# Altium PCB CPU.2.PcbDoc
Units mm, origin at the board's own origin, x right, y up, seen from the top; angles counter-clockwise.
Board outline 42.5 x 22 mm, 2 copper layers (Top Layer, Bottom Layer), stack 0.904 mm thick; 38 components, 70 nets, 300 pads, 85 vias.
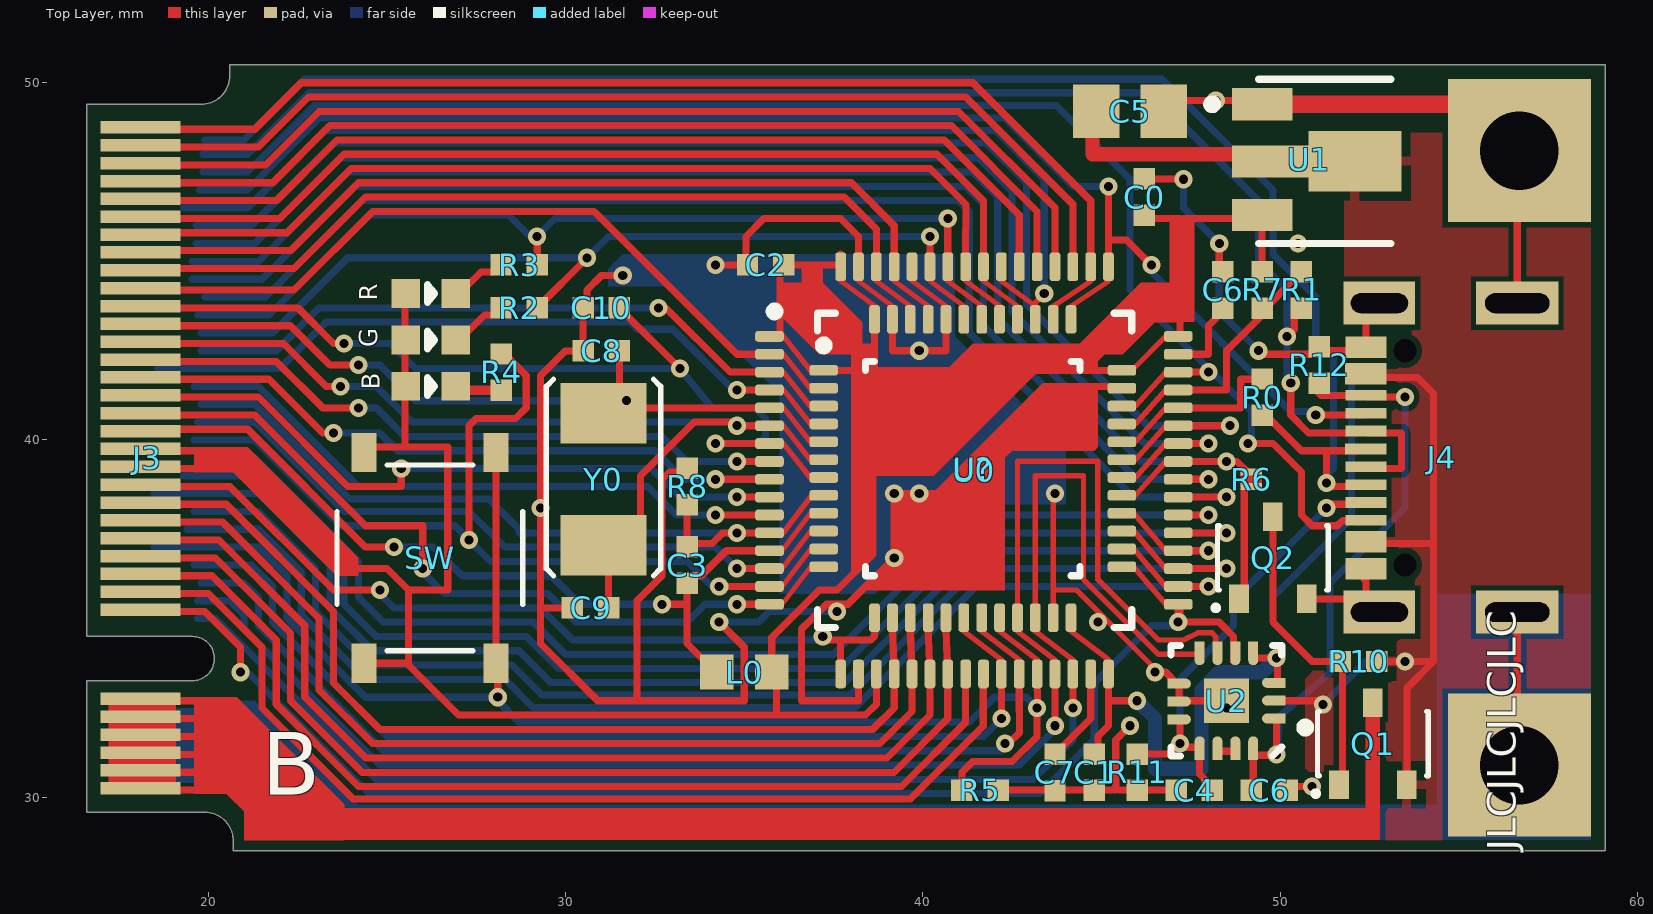
[diagram p0: Top Layer view]
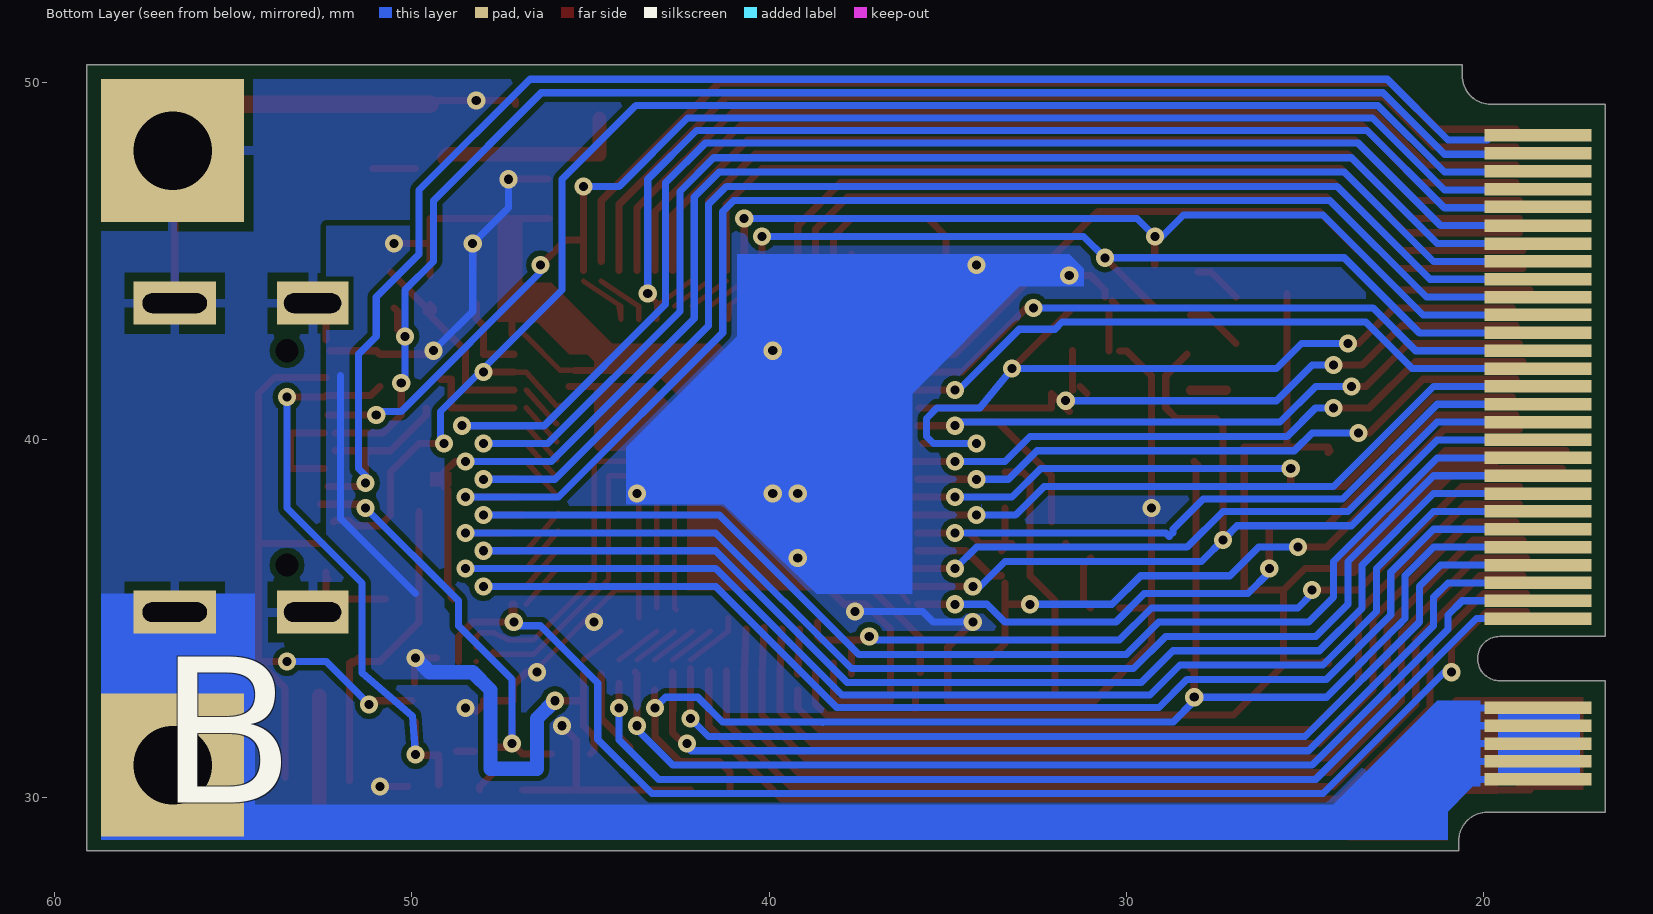
[diagram p1: Bottom Layer view, seen from below]
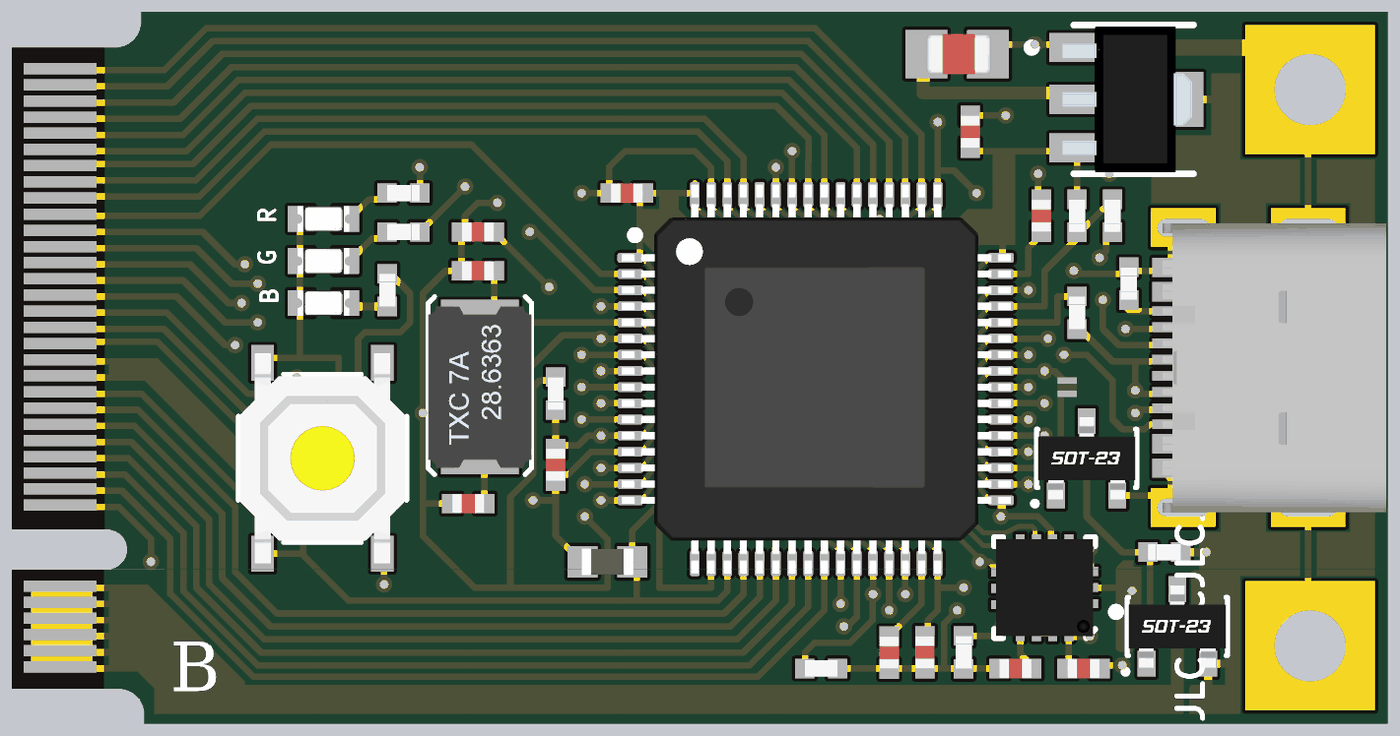
[diagram p2: 3D render of the assembled board from above, using the file's embedded part models]

## Layer stack, top to bottom
Top Solder: solder mask 0.0102, Solder Resist, Dk 3.5
Top Layer: signal copper 0.127
Dielectric 1: core 0.65, FR-4, Dk 4.2
Bottom Layer: signal copper 0.127
Bottom Solder: solder mask 0.0102, Solder Resist, Dk 3.5

## Board outline
16.6,29.575 16.6,33.26 19.54,33.26 19.55,33.26 ccw(c19.55,33.88) 19.55,34.5 16.6,34.5 16.6,34.525 16.6,49.4 19.8,49.4 ccw(c19.8,50.2) 20.6,50.2 20.6,50.5 59.1,50.5 59.1,28.5 20.7,28.5 20.7,28.775 ccw(c19.9,28.775) 19.9,29.575

## Design rules (kind name [scope] priority, off if disabled: settings)
Clearance [All] p1: gap=0.152 ignorepadtopadclearanceinfootprint=FALSE except(0: Arc-Hole Track-Hole SMDPad-Hole THPad-Hole Via-Hole Fill-Hole Poly-Hole Region-Hole Text-Hole)
DiffPairsRouting [All] p1: maxlimit=0.254 minlimit=0.254 mostfreqgap=0.254 toplayer_minwidth=0.381 toplayer_maxwidth=1 toplayer_prefwidth=0.381 bottomlayer_minwidth=0.381 bottomlayer_maxwidth=1 bottomlayer_prefwidth=0.381 maxuncoupledlength=12.7
PolygonConnect [All] p1: thpad.connectstyle=Relief thpad.reliefconductorwidth=0.254 thpad.reliefentries=4 thpad.polygonreliefangle="90 Angle" thpad.airgapwidth=0.254 smdpad.connectstyle=Relief smdpad.reliefconductorwidth=0.254 smdpad.reliefentries=4 smdpad.polygonreliefangle="90 Angle" smdpad.airgapwidth=0.254 via.connectstyle=Direct via.reliefconductorwidth=0.254 via.reliefentries=4 via.polygonreliefangle="90 Angle" via.airgapwidth=0.254
RoutingVias [All] p1: holewidth=0.711 width=1.27 viastyle="Through Hole" minholewidth=0.711 minwidth=1.27 maxholewidth=0.711 maxwidth=1.27
SolderMaskExpansion [All] p1: expansion=0.102
Width [All] p1: maxlimit=1 minlimit=0.15 preferedwidth=0.2 minimp=50.000000 maximp=50.000000 favimp=50.000000
29 further rules are at their usual default settings.

## Components (designator, comment, footprint, x,y, rotation, side; value= is the part's Value field where it differs from the comment)
B "19-217/BHC-ZL1M2RY/3T" D_0603 26.23,41.5 r180 top
C0 "CL05A106MQ5NUNC" C_0402 46.2,46.8 r270 top value=10uF
C1 "CL05A106MQ5NUNC" C_0402 44.8,30.7 r90 top value=10uF
C2 "CL05A106MQ5NUNC" C_0402 35.6,44.9 r0 top value=10uF
C3 "CL05A105KA5NQNC" C_0402 33.4,36.5 r270 top value=1uF
C4 "CL05B104KO5NNNC" C_0402 47.6,30.2 r180 top value=100nF
C5 "CL21A106KAYNNNE" C_0805 45.8,49.2 r180 top value=10uF
C6 "CL05B104KO5NNNC" C_0402 49.7,30.2 r0 top value=100nF
C6 "CL05A106MQ5NUNC" C_0402 48.4,44.2 r270 top value=10uF
C7 "CL05A106MQ5NUNC" C_0402 43.7,30.692 r90 top value=10uF
C8 "0402CG120J500NT" C_0402 31,42.5 r0 top value=12pF
C9 "0402CG120J500NT" C_0402 30.7,35.3 r0 top value=12pF
C10 "0402CG101J500NT" C_0402 31,43.7 r0 top
G "19-217/GHC-YR1S2/3T" D_0603 26.23,42.8 r180 top
J3 "NGFF_MALE_B" NGFF_MALE_B 20.725,39.5 r270 top
J4 "918-418K2023S40001" DX07S016JA1R1500 55.7,39.5 r90 top
L0 "SDFL1608S100KTF" L_0603 35,33.5 r0 top value=10uH
Q1 "AO3401A" TO-236AB 52.6,31.5 r90 top
Q2 "2N7002" TO-236AB 49.8,36.7 r90 top
R "KT-0603R" D_0603 26.23,44.1 r180 top
R0 "0402WGF220JTCE" R_0402 49.5,41.2 r90 top value=22R
R1 "0402WGF220JTCE" R_0402 50.6,44.2 r90 top value=22R
R2 "0402WGF470JTCE" R_0402 28.7,43.7 r180 top value=47R
R3 "0402WGF1200TCE" R_0402 28.7,44.9 r180 top value=120R
R4 "0402WGF470JTCE" R_0402 28.2,41.9 r270 top value=47R
R5 "0402WGF1001TCE" R_0402 41.6,30.2 r0 top value=1k
R6 "0" NET_TIE 49.2,38.9 r90 top
R7 "0402WGF1501TCE" R_0402 49.5,44.2 r90 top value=1.5k
R8 "0402WGF0000TCE" R_0402 33.4,38.7 r270 top value=0R
R10 "0402WGF1000TCE" R_0402 52.2,33.8 r180 top value=100R
R11 "0402WGF5101TCE" R_0402 46,30.7 r270 top value=5.1k
R12 "0402WGF5101TCE" R_0402 51.1,42.1 r90 top value=5.1k
SW "TS-1187A-C-C-B" TS-1187A-C-C-B 26.2,36.7 r270 top
U0 "GD32F405RGT6" QFP-64-P0.5MM 41.45,39.15 r0 top
U1 "HT7533-1" SOT-223-3 51.3,47.8 r0 top
U2 "FUSB302BMPX" QFN-14-P0.5MM 48.5,32.7 r180 top
U? "GD32F103CBT6" QFP-48-P0.5MM 41.4,39.2 r0 top
Y0 "X50328MSB2GI" YSX530GA 31.06,38.9 r270 top value=8MHz

## Footprints (in the part's own frame and the unit in brackets; to place one, negate y for a bottom-side part, rotate by r counter-clockwise, add the part's x,y. Pads: shape width x height; smd on the part's side, far side on the other; paste and mask are expansions set on the pad)
C_0402 [mm] "Chip Capacitor; Body 1.0 x 0.5 mm (LxW typ)"
  rect 0.6x0.6 smd: 1(-0.508,0) 2(0.508,0)
  body extent -0.5,-0.3 0.5,0.3, height 0.2
C_0805 [mm] "Chip Capacitor; Body 2.0 x 1.2 mm (LxW typ)"
  rect 1.3x1.5 smd: 1(-0.95,0) 2(0.95,0)
  body extent -1.05,-0.62 0.95,0.62, height 0.78
D_0603 [mm] "Chip Diode; Body 1.6 x 0.8 mm (LxW typ)"
  rect 0.8x0.8 smd: 1(-0.7,0) 2(0.7,0)
  silkscreen extent -0.1,-0.25 0.1,0.25, body extent -0.8,-0.4 0.8,0.4, height 0.35
DX07S016JA1R1500 [mm] "USB-C (USB TYPE-C) USB 2.0 Receptacle Connector 24 (16+8 Dummy) Position Surface Mount, Right Angle"
  rect 1.2x2.3 hole 0.55 slot 1.8 at 90 deg: 0(-4.32,-0.943) 0(4.33,-0.943)
  rect 1.2x2 hole 0.55 slot 1.6 at 90 deg: 0(-4.32,2.917) 0(4.33,2.917)
  rect 0.6x1.15 smd: A1_B12(-3.1,3.297) A4_B9(-2.35,3.297) A9_B4(2.35,3.3) A12_B1(3.1,3.297)
  rect 0.3x1.15 smd: A5(-1.25,3.297) A6(-0.25,3.297) A7(0.25,3.3) A8(1.25,3.297) B5(1.75,3.297) B6(0.75,3.297) B7(-0.75,3.297) B8(-1.75,3.297)
  round 0 hole 0.65 unplated: M(-3,2.2) M(3,2.2)
  body extent -4.47,-3.35 4.47,3.55, height 3.18
L_0603 [mm]
  rect 0.93x0.98 smd: 1(-0.77,0) 2(0.77,0)
  body extent -0.82,-0.41 0.83,0.41, height 0.46
NET_TIE [mm] "Body 1.0 x 0.5 mm (LxW typ)"
  rect 0.2x0.6 smd: 1(-0.2,0)
  rect 0.2x0.6 smd mask+0.102: 2(0.2,0)
  Top Layer region: -0.2,-0.3 0.2,-0.3 0.2,0.3 -0.2,0.3
NGFF_MALE_B [mm] "NGFF B Key, Male"
  rect 0.35x2.25 smd: 1(9.25,-2.625) 3(8.75,-2.625) 5(8.25,-2.625) 7(7.75,-2.625) 9(7.25,-2.625) 11(6.75,-2.625) 21(4.25,-2.625) 23(3.75,-2.625) 25(3.25,-2.625) 27(2.75,-2.625) 29(2.25,-2.625) 31(1.75,-2.625) 33(1.25,-2.625) 35(0.75,-2.625) 37(0.25,-2.625) 39(-0.25,-2.625) 41(-0.75,-2.625) 43(-1.25,-2.625) 45(-1.75,-2.625) 47(-2.25,-2.625) 49(-2.75,-2.625) 51(-3.25,-2.625) 53(-3.75,-2.625) 55(-4.25,-2.625) 57(-4.75,-2.625) 59(-5.25,-2.625) 61(-5.75,-2.625) 63(-6.25,-2.625) 65(-6.75,-2.625) 67(-7.25,-2.625) 69(-7.75,-2.625) 71(-8.25,-2.625) 73(-8.75,-2.625) 75(-9.25,-2.625)
  rect 0.35x3 smd far side: 2(9,-2.25) 4(8.5,-2.25) 6(8,-2.25) 8(7.5,-2.25) 10(7,-2.25) 20(4.5,-2.25) 22(4,-2.25) 24(3.5,-2.25) 26(3,-2.25) 28(2.5,-2.25) 30(2,-2.25) 32(1.5,-2.25) 34(1,-2.25) 36(0.5,-2.25) 38(0,-2.25) 40(-0.5,-2.25) 42(-1,-2.25) 44(-1.5,-2.25) 46(-2,-2.25) 48(-2.5,-2.25) 50(-3,-2.25) 52(-3.5,-2.25) 54(-4,-2.25) 56(-4.5,-2.25) 58(-5,-2.25) 60(-5.5,-2.25) 62(-6,-2.25) 64(-6.5,-2.25) 66(-7.025,-2.25) 68(-7.525,-2.25) 70(-8.025,-2.25) 72(-8.525,-2.25) 74(-9.025,-2.25)
QFN-14-P0.5MM [mm] "Quad Flat No Lead, Plastic; 14 Terminals; Body 2.5 x 2.5 mm; Pitch 0.5 mm"
  rect 1.25x1.25 smd: 0(0,0)
  rect 0.28x0.28 smd: 1(-1.515,0.496) 2(-1.515,-0.004) 3(-1.515,-0.504) 4(-0.75,-1.515) 5(-0.25,-1.515) 6(0.25,-1.515) 7(0.75,-1.515) 8(1.515,-0.479) 9(1.515,0.021) 10(1.515,0.521) 11(0.75,1.515) 12(0.25,1.515) 13(-0.25,1.515) 14(-0.75,1.515)
  oval 0.66x0.28 smd: 1(-1.325,0.496) 2(-1.325,-0.004) 3(-1.325,-0.504) 8(1.325,-0.479) 9(1.325,0.021) 10(1.325,0.521)
  oval 0.28x0.66 smd: 4(-0.75,-1.325) 5(-0.25,-1.325) 6(0.25,-1.325) 7(0.75,-1.325) 11(0.75,1.325) 12(0.25,1.325) 13(-0.25,1.325) 14(-0.75,1.325)
  silkscreen extent -2.33,-1.55 1.55,1.55, body extent -1.5,-1.5 1.5,1.5, height 0.81
QFP-48-P0.5MM [mm] "QFP; 48 Leads; Body 7 x 7 mm; Pitch 0.5 mm"
  rrect50% 0.8x0.3 smd: 1(-4.175,2.75) 2(-4.175,2.25) 3(-4.175,1.75) 4(-4.175,1.25) 5(-4.175,0.75) 6(-4.175,0.25) 7(-4.175,-0.25) 8(-4.175,-0.75) 9(-4.175,-1.25) 10(-4.175,-1.75) 11(-4.175,-2.25) 12(-4.175,-2.75) 25(4.175,-2.75) 26(4.175,-2.25) 27(4.175,-1.75) 28(4.175,-1.25) 29(4.175,-0.75) 30(4.175,-0.25) 31(4.175,0.25) 32(4.175,0.75) 33(4.175,1.25) 34(4.175,1.75) 35(4.175,2.25) 36(4.175,2.75)
  rrect50% 0.3x0.8 smd: 13(-2.75,-4.175) 14(-2.25,-4.175) 15(-1.75,-4.175) 16(-1.25,-4.175) 17(-0.75,-4.175) 18(-0.25,-4.175) 19(0.25,-4.175) 20(0.75,-4.175) 21(1.25,-4.175) 22(1.75,-4.175) 23(2.25,-4.175) 24(2.75,-4.175) 37(2.75,4.175) 38(2.25,4.175) 39(1.75,4.175) 40(1.25,4.175) 41(0.75,4.175) 42(0.25,4.175) 43(-0.25,4.175) 44(-0.75,4.175) 45(-1.25,4.175) 46(-1.75,4.175) 47(-2.25,4.175) 48(-2.75,4.175)
  silkscreen extent -4.3,-3 3,3.57, body extent -4.5,-4.5 4.5,4.5, height 1.6
QFP-64-P0.5MM [mm] "64-Pin Plastic Quad Flat Pack (TQFP)"
  rrect50% 0.8x0.3 smd: 1(-5.742,3.75) 2(-5.742,3.25) 3(-5.742,2.75) 4(-5.742,2.25) 5(-5.742,1.75) 6(-5.742,1.25) 7(-5.742,0.75) 8(-5.742,0.25) 9(-5.742,-0.25) 10(-5.742,-0.75) 11(-5.742,-1.25) 12(-5.742,-1.75) 13(-5.742,-2.25) 14(-5.742,-2.75) 15(-5.742,-3.25) 16(-5.742,-3.75) 33(5.7,-3.75) 34(5.7,-3.25) 35(5.7,-2.75) 36(5.7,-2.25) 37(5.7,-1.75) 38(5.7,-1.25) 39(5.7,-0.75) 40(5.7,-0.25) 41(5.7,0.25) 42(5.7,0.75) 43(5.7,1.25) 44(5.7,1.75) 45(5.7,2.25) 46(5.7,2.75) 47(5.7,3.25) 48(5.7,3.75)
  rrect50% 0.3x0.8 smd: 17(-3.75,-5.7) 18(-3.25,-5.7) 19(-2.75,-5.7) 20(-2.25,-5.7) 21(-1.75,-5.7) 22(-1.25,-5.7) 23(-0.75,-5.7) 24(-0.25,-5.7) 25(0.25,-5.7) 26(0.75,-5.7) 27(1.25,-5.7) 28(1.75,-5.7) 29(2.25,-5.7) 30(2.75,-5.7) 31(3.25,-5.7) 32(3.75,-5.7) 49(3.75,5.7) 50(3.25,5.7) 51(2.75,5.7) 52(2.25,5.7) 53(1.75,5.7) 54(1.25,5.7) 55(0.75,5.7) 56(0.25,5.7) 57(-0.25,5.7) 58(-0.75,5.7) 59(-1.25,5.7) 60(-1.75,5.7) 61(-2.25,5.7) 62(-2.75,5.7) 63(-3.25,5.7) 64(-3.75,5.7)
  silkscreen extent -5.72,-4.4 4.4,4.57, body extent -6.01,-6.01 6.01,6.01, height 1.55
R_0402 [mm] "Body 1.0 x 0.5 mm (LxW typ)"
  rect 0.6x0.6 smd: 1(-0.508,0) 2(0.508,0)
  body extent -0.5,-0.25 0.5,0.25, height 0.35
SOT-223-3 [mm] "SOT223, 4-Leads, Body IPC High Density"
  rect 1.7x0.9 smd: 1(-1.8,1.6) 3(-1.8,-1.5)
  rect 2.5x0.9 smd: 2(-1.4,0)
  rect 2.6x1.7 smd: 2(0.8,0)
  silkscreen extent -3.32,-2.3 1.8,2.3, body extent -2.25,-2.25 1.75,2.25, height 1.5
TO-236AB [mm] "SOT-23-3 Leads; Body 3.1 x 3 mm, inc. leads (LxW max)"
  rect 0.8x0.55 smd: 1(-1.15,0.95) 2(-1.15,-0.95) 3(1.15,0)
  silkscreen extent -1.45,-1.55 0.9,1.65, body extent -1.28,-1.5 1.27,1.5, height 1
TS-1187A-C-C-B [mm] "Tactile Switch SPST-NO Top Actuated Surface Mount"
  rect 1.1x0.7 smd: 1(-2.95,1.85) 1(2.95,1.85) 2(-2.95,-1.85) 2(2.95,-1.85)
  silkscreen extent -2.6,-2.6 2.6,2.6, body extent -3.25,-2.54 3.25,2.54, height 1.52
YSX530GA [mm]
  rect 1.7x2.4 smd: 1(-1.85,0) 2(1.85,0)
  silkscreen extent -2.8,-1.6 2.7,1.6, body extent -2.5,-1.6 2.5,1.6, height 1.2

## Part data
B: "D - LED - 0603 - Blue", JLC Availability=Basic, LCSC Part #=C72041
C0 C1 C2 C6 C7: "C - CAPACITOR - MLCC - 10uF - 6.3V - 0402", JLC Availability=Basic, LCSC Part #=C15525, WVDC=6.3
C3: "C - CAPACITOR - MLCC - 1uF - 25V - 0402", JLC Availability=Basic, LCSC Part #=C52923, WVDC=16
C4 C6: "C - CAPACITOR - MLCC - 100nF - 16V - 0402", JLC Availability=Basic, LCSC Part #=C1525, WVDC=16
C5: "C - CAPACITOR - MLCC - 10uF - 25V - 0805", LCSC Part #=C15850, Availability=Basic, WVDC=25
C8 C9: "C - CAPACITOR - MLCC - 12pF - 50V - 0402", JLC Availability=Basic, LCSC Part #=C1547, WVDC=50
C10: "C - CAPACITOR - MLCC - 100pF - 50V - 0402", JLC Availability=Extended, LCSC Part #=C1546
G: "D - LED - 0603 - Green", JLC Availability=Basic, LCSC Part #=C72043
J3: "NGFF Male Finger, B Key", Manufacturer=Kyocera, Manufacturer P/N=245863050024829
J4: "J - JACK - USB - Type C - Recepticle - SMT - 90°", JLC Availability=LCSC, LCSC Part #=C167321
L0: "L - INDUCTOR - 10uH - 0603", JLC Availability=Basic, LCSC Part #=C1035
Q1: "Q - TRANSISTOR - MOSFET (P) - 30V - 1.4A - 0.44 Ohm", JLC Availability=Basic, LCSC Part #=C15127, WVDC=30
Q2: "Q - TRANSISTOR - MOSFET (N) - 60V - 200mW", JLC Availability=Basic, LCSC Part #=C8545, WVDC=60
R: "D - LED - 0603 - Red", JLC Availability=Basic, LCSC Part #=C2286
R0 R1: "R - RESISTOR - SMD - 22R - 1% - 0402", JLC Availability=Basic, LCSC Part #=C25092
R2 R4: "R - RESISTOR - SMD - 47R - 1% - 0402", JLC Availability=Basic, LCSC Part #=C25118
R3: "R - RESISTOR - SMD - 120R - 1% - 0402", JLC Availability=Basic, LCSC Part #=C25079
R5: "R - RESISTOR - SMD - 1k - 1% - 0402", JLC Availability=Basic, LCSC Part #=C11702
R6: library part NET_TIE, "R - Net Tie"
R7: "R - RESISTOR - SMD - 1.5k - 1% - 0402", JLC Availability=Basic, LCSC Part #=C25867
R8: "R - RESISTOR - SMD - 0R - 1% - 0402", JLC Availability=Basic, LCSC Part #=C17168
R10: "R - RESISTOR - SMD - 100R - 1% - 0402", JLC Availability=Basic, LCSC Part #=C25076
R11 R12: "R - RESISTOR - SMD - 5.1k - 1% - 0402", JLC Availability=Basic, LCSC Part #=C25905
SW: "SW - SWITCH - SPST - NO - Top Actuated Surface Mount", JLC Availability=Extended, LCSC Part #=C318889
U0: "U - IC - MCU 32BIT 1MB FLASH 64LQFP", JLC Availability=Extended, LCSC Part #=C99031, ComponentLink1Description=Upverter, ComponentLink1URL=https://upverter.com/upn/revision/179c87d5c3d4f257/, ComponentLink2Description=Datasheet, ComponentLink2URL=http://www.st.com/content/ccc/resource/technical/document/datasheet/33/d4/6f/1d/df/0b/4c/6d/CD00161566.pdf/files/CD00161566.pdf/jcr:content/translations/en.CD00161566.pdf
U1: "U - IC - 3V3 Power Regulator", JLC Availability=Basic, LCSC Part #=C14289, VOut=3.3
U2: "U - IC - USB PD PHY", JLC Availability=Extended, LCSC Part #=C442699
U?: "U - IC - MCU, 128 KB Flash, 20 KB Internal RAM, 37 I/Os, 48-pin LQFP, -40 to 85 degC", I/Os (High Current)=37, JLC Availability=Extended, LCSC Part #=C77979, Operating Frequency(F) (Processor speed) (MHz)=72, ComponentLink1Description="Manufacturer URL", ComponentLink1URL=http://www.st.com/web/en/home.html, ComponentLink2Description=Datasheet, ComponentLink2URL=http://www.st.com/st-web-ui/static/active/en/resource/technical/document/datasheet/CD00161566.pdf, ComponentLink3Description="Package Specification", ComponentLink3URL=http://www.st.com/st-web-ui/static/active/en/resource/technical/document/datasheet/DM00058181.pdf, FLASH Size (Prog) (kB)=128, Internal RAM Size (kB)=20
Y0: "Y - RESONATOR - 8MHZ ±10PPM - SMD-5032", LCSC Part #=C115962, Availability=Basic

## Free pads (board coordinates)
  rect 4x4 hole 2.2: 2(56.7,30.9) 2(56.7,48.1)

## Via types
v1: diameter 0.508, hole 0.254, Top Layer to Bottom Layer, tented both sides, 85 vias

## Nets (pads, with @x,y where several pads share a name; then routed paths per layer and width w, separated by ;. In a path a pad name is that pad's centre, name@x,y a point inside that pad or via, vN(x,y) a via of type N, cw(c..) or ccw(c..) an arc to the next point about the centre after c; other vN are vias at no path point)
^PA15: J3.75 U0.50 U?.38 | length 30.8
  Top Layer w0.15: U?.38 43.65,43.75 U0.50@44.7,44.45
  Top Layer w0.2: J3.75@19.1,48.7 21.3,48.7 22.6,50 41.4,50 44.7,46.7 U0.50@44.7,45
^PB2_BOOT1: J3.28 R5.1 SW.1 U0.28 U?.20 | length 40.3
  Top Layer w0.15: U?.20@42.15,34.65 U0.28@43.2,33.85
  Top Layer w0.2: SW.1@28,39.3 28.05,39.25 SW.1@28.05,33.75 ; SW.1@28.05,39.35 SW.1@28.1,39.4 ; v1(28.1,32.8) SW.1@28.1,33.6 ; SW.1@28.2,33.6 SW.1@28.208,33.608 ; R5.1@41.1,30.2 41.1,30.7 41.4,31 42.5,31 43.194,31.694 43.194,32.31 43.206,32.323 43.206,32.994 43.2,33
  Bottom Layer w0.2: J3.28 21.4,37 22.2,36.2 22.2,35 ; 22.4,34.8 22.2,35 ; 38.5,32.1 38.51,32.11 ; v1(43.2,32.5) 42.9,32.8 42,32.8 41.31,32.11 38.51,32.11 ; 22.2,35 24.4,32.8 v1(28.1,32.8) 28.1,32.7 28.69,32.11 38.51,32.11
^PB3/PPS: J3.66 U0.55 U?.39 | length 30.8
  Top Layer w0.15: U0.55@42.2,44.45 U?.39@43.15,43.75 ; U?.39 U?.39@43.15,43.75 ; v1(43.4,44.1) 43.15,43.85 U?.39@43.15,43.75
  Bottom Layer w0.2: J3.66@19.3,46.5 21.1,46.5 23.262,48.662 42.038,48.662 43.4,47.3 43.4,44.2 v1@43.3,44.1
^PB4: J3.65 U0.56 U?.40 | length 27.1
  Top Layer w0.15: U0.56@41.7,44.45 U?.40@42.65,43.75
  Top Layer w0.2: J3.65@19,46.2 22,46.2 23.8,48 40.4,48 41.7,46.7 U0.56@41.7,44.75
^PB10_SCL2_RX3: J3.22 U0.29 U2.6 U?.21 | length 43.6
  Top Layer w0.15: U?.21@42.6,35.25 42.65,35.3 42.65,39.4 44.9,39.4 44.9,36.1 46.6,34.4 47.3,34.4 47.7,34.6 48.1,34.6 48.2,34.5 U2.6@48.2,34.2 ; U?.21@42.65,34.65 U0.29@43.7,33.85
  Top Layer w0.2: v1@43.7,31.9 U0.29 U0.29@43.75,33.5
  Bottom Layer w0.2: J3.22@19.7,35.5 20.6,35.5 21,35.1 21,34.7 24.8,30.9 42.7,30.9 v1@43.7,31.9
  other v1: 43.7,32
^PB11_SDA2_TX3: J3.20 U0.30 U2.7 U?.22 | length 42.1
  Top Layer w0.15: U?.22@43.15,34.65 U0.30@44.2,33.85 ; U?.22@43.15,35.3 43.15,39 44.5,39 44.5,36.1 46.6,34 47.8,34 U2.7@47.725,34.075
  Top Layer w0.2: U0.30@44.2,33.2 v1(44.2,32.5) v1@44.3,32.4
  Bottom Layer w0.2: J3.20@19.7,35 20.2,35 24.7,30.5 43.1,30.5 44.2,31.6 v1(44.2,32.5)
^PB12_SS2: J3.21 U0.33 U2.5 U?.25 | length 38.4
  Top Layer w0.15: U?.25@45.95,36.4 U0.33@46.8,35.4
  Top Layer w0.2: J3.21@18.8,35.2 19.9,35.2 20.9,34.2 v1(20.9,33.5) ; v1(47.15,34.9) U0.33 ; U0.33@47.2,35.4 47.2,34.9 48.3,34.9 48.7,34.5 48.7,34.215 48.7,34.015 U2.5@48.7,33.8
  Bottom Layer w0.2: v1@21,33.6 24.5,30.1 43.284,30.1 44.8,31.616 44.8,33.2 46.4,34.8 v1@47.15,34.8
^PB13_SCK2: J3.30 U0.34 U?.26 | length 35.6
  Top Layer w0.15: U?.26@45.95,36.9 U0.34@46.8,35.9
  Top Layer w0.2: U0.34@46.85,35.9 U0.34 v1@48.1,35.9
  Bottom Layer w0.2: J3.30@19.4,37.5 21.4,37.5 22.6,36.3 22.6,35.1 24.4,33.3 28.3,33.3 29.09,32.51 38.106,32.51 ; 38.2,32.6 38.11,32.51 38.106,32.51 ; v1@48.1,35.9 41.497,35.9 38.106,32.51
  other v1: 48,35.9
^PB14_MISO2: J3.32 U0.35 U?.27 | length 36.3
  Top Layer w0.15: U?.27@45.904,37.454 U0.35@46.8,36.4
  Top Layer w0.2: U0.35@47.05,36.4 U0.35 v1@48.6,36.4
  Bottom Layer w0.2: J3.32@19.6,38 21.4,38 23,36.4 23,35.2 24.5,33.7 28.5,33.7 29.338,32.862 37.96,32.862 ; 38,32.9 37.962,32.862 37.96,32.862 ; v1@48.6,36.4 41.498,36.4 37.96,32.862
  other v1: 48.5,36.4
^PB15_MOSI2: J3.34 U0.36 U?.28 | length 36.6
  Top Layer w0.15: U?.28@45.904,37.954 U0.36@46.8,36.9
  Top Layer w0.2: U0.36@46.95,36.9 U0.36 v1@48.1,36.9
  Bottom Layer w0.2: J3.34 21.4,38.5 23.4,36.5 23.4,35.3 24.6,34.1 28.7,34.1 29.586,33.214 37.814,33.214 41.5,36.9 v1@48.1,36.9
  other v1: 48,36.9
^~PA8: J3.60 R6.2 U0.41 U?.29 | length 38.9
  Top Layer w0.15: U?.29@45.95,38.45 U0.41@46.8,39.4
  Top Layer w0.2: U0.41@47.05,39.4 U0.41 v1(48.5,39.4) 48.8,39.4 R6.2@49.1,39.1
  Bottom Layer w0.2: J3.60@19.55,45 21.4,45 23.9,47.5 41.4,47.5 42.1,46.8 42.1,43.4 46.1,39.4 v1(48.5,39.4) v1@48.6,39.4
^~PA9_TX1: J3.62 U0.42 U?.30 | length 37.1
  Top Layer w0.15: U?.30@45.95,38.95 U0.42@46.8,39.9
  Top Layer w0.2: U0.42@46.95,39.9 v1(48,39.9) ; U0.42@47.05,39.9 U0.42
  Bottom Layer w0.2: J3.62@19.65,45.5 21.3,45.5 23.7,47.9 41.557,47.9 42.5,46.957 42.5,43.6 46.2,39.9 v1@48.1,39.9
^~PA10_RX1: J3.64 U0.43 U?.31 | length 38.1
  Top Layer w0.15: U?.31@45.95,39.45 U0.43@46.8,40.4
  Top Layer w0.2: U0.43@46.9,40.4 U0.43 v1(48.6,40.4)
  Bottom Layer w0.2: J3.64@19.65,46 21.2,46 21.8,46.6 23.51,48.31 41.79,48.31 42.9,47.2 42.9,43.8 46.3,40.4 v1(48.6,40.4)
^~PB6_SCL1: J3.54 R3.1 U0.58 U?.42 | length 26.2
  Top Layer w0.15: U0.58@40.7,44.45 U?.42@41.65,43.75 ; U0.58@40.7,44.75 U0.58
  Top Layer w0.2: v1@29.2,45.6 29.208,45.592 R3.1 ; U0.58@40.7,44.75 v1(40.7,46.2)
  Bottom Layer w0.2: J3.54@19.7,43.5 21.7,43.5 24.5,46.3 28.4,46.3 29.1,45.6 29.1,45.7 v1@29.2,45.8 ; v1(29.2,45.7) 29.7,46.2 v1(40.7,46.2)
^~PB7_SDA1: J3.52 R2.1 U0.59 U?.43 | length 26.2
  Top Layer w0.15: U0.59@40.2,44.45 U?.43@41.15,43.75 ; U?.43@41.1,43.7 U?.43
  Top Layer w0.2: R2.1 30.6,45.092 v1(30.6,45.1) ; U0.59@40.2,44.65 U0.59 v1(40.2,45.7)
  Bottom Layer w0.2: J3.52@19.8,43 21.8,43 23.9,45.1 v1(30.6,45.1) 31.2,45.7 v1(40.2,45.7) v1@40.2,45.8
CC1: C4.1 J4.A5 R11.1 U2.10 U2.11 | length 12.8
  Top Layer w0.2: R11.1@46.1,31.208 46.908,31.208 v1(47.2,31.5) ; v1@47.2,31.7 U2.10@47.2,32.154 ; v1@47.25,31.4 U2.11@47.7,31.4 ; U2.11@47.75,31.085 47.75,30.65 48.108,30.292 C4.1 ; v1@51.2,38.1 v1(51.3,38.1) ; v1@51.3,38.2 J4.A5@52.553,38.2
  Bottom Layer w0.2: v1(47.2,31.5) 47.2,33.3 48.7,34.8 48.7,35.5 v1(51.3,38.1)
CC2: C6.1@49.192,30.2 J4.B5 R12.1 U2.1 U2.14 | length 16.2
  Top Layer w0.2: C6.1@49.25,30.35 U2.14@49.25,31.085 ; U2.14@49.25,31.175 49.9,31.175 v1(49.9,31.2) ; v1@49.9,31.3 U2.1@49.9,32.1 ; R12.1@50.9,41.5 51.15,41.25 J4.B5 ; J4.B5@52.453,41.2 53.3,41.2 v1@53.4,41.1
  Bottom Layer w0.2: v1@49.9,31.3 49.908,31.299 49.982,32.271 51.4,33.486 51.4,36 53.5,38.1 v1(53.5,41.2)
GND: C0.1 C1.1 C2.1 C4.2 C5.1 C6.1@48.4,44.708 C6.2@50.208,30.2 C7.1 C8.1 C9.1 C10.1 J3.2 J3.4 J3.6 J3.8 J3.10 J4.0 J4.A1_B12 J4.A12_B1 pad.2 Q2.2 R5.2 R8.1 R11.2 R12.2 U0.18 U0.60 U0.63 U1.1 U2.0 U2.8 U2.9 U?.23 U?.35 U?.44 U?.47 | length 124.7
  Top Layer w0.15: U0.63@38.2,44.45 U?.47@39.15,43.75 ; U0.60@39.7,44.45 U?.44@40.65,43.75 ; U?.23 43.65,35.8 ; v1@43.65,38.45 43.65,35.8 ; v1@46.6,33.5 46.55,33.55 44.3,35.8 43.65,35.8
  Top Layer w0.2: 29.4,35.3 C9.1 ; 30.192,42.492 29.992,42.492 29.3,41.8 v1(29.3,38.1) 29.3,34.3 30.9,32.7 32,32.7 ; C10.1@30.292,43.7 C10.1@30.292,43.708 ; C10.1@30.3,43.7 C10.1@30.292,43.708 ; C10.1@30.4,43.9 30.292,43.792 C10.1@30.292,43.708 ; C8.1 30.492,43.692 C10.1@30.5,43.7 ; 30.6,44 30.6,44.2 31,44.6 v1(31.6,44.6) ; R8.1@33.4,39.108 32.908,39.108 32.7,38.9 32.7,36.2 32,35.5 32,32.7 ; v1(34.2,44.9) C2.1@35.05,44.9 ; v1(34.3,34.9) 35,34.2 35,32.7 32,32.7 ; C2.1@35.1,44.9 C2.1 C2.1@35.05,44.9 ; U0.18@38.2,33.75 U0.18 38.2,32.7 36.6,32.7 36.6,34.7 36.85,34.95 37.3,35.4 37.9,35.4 v1(39.2,36.7) v1(39.2,38.5) v1(39.9,38.5) 40.4,38.5 43.4,41.5 U?.35@45.6,41.5 ; U0.63 38.2,45.7 37.7,46.2 35.55,46.2 35.05,45.7 C2.1@35.05,44.9 ; U?.47 39.15,42.5 v1(39.9,42.5) 40.65,42.5 U?.44@40.65,43.2 ; R5.2@42.2,30.2 45.4,30.2 45.4,31.6 v1(45.8,32) ; 45.5,30.2 C4.2@46.9,30.2 ; C0.1 47.292,47.308 v1@47.3,47.316 ; v1@46.5,33.6 v1(46.5,33.5) 46.6,33.5 46.8,33.5 U2.8@47.1,33.2 ; C5.1@47.1,49.4 47.1,49.5 v1(48.2,49.5) U1.1@50,49.5 ; U2.8@47.175,33.075 47.175,32.7 U2.0@48,32.7 ; U2.0@48,32.6 U2.0@48.2,32.4 ; C6.1@48.3,44.808 v1(48.3,45.5) ; v1(49.4,42.5) 49.5,42.4 50.9,42.4 51,42.5 J4.A12_B1@52.3,42.5 ; C6.2@50.108,30.3 v1@50.8,30.3 ; Q2.2 52.35,35.55 J4.0@52.4,35.6 ; 52.35,36.1 52.403,36.153 J4.A1_B12@52.403,36.3 ; J4.0@52.403,35.4 52.403,36.1 ; J4.A12_B1@52.403,42.8 J4.0@52.403,43.397 ; pad.2@56.2,30.6 56.643,31.043 J4.0@56.643,35.08 ; pad.2@56.5,47.2 56.643,47.057 56.643,43.83 J4.0@56.643,43.73 ; pad.2@56.9,49.3 pad.2@56.9,49.4
  Top Layer w0.5: U1.1 pad.2@56.9,49.4
  Bottom Layer w0.15: v1(39.2,38.5) v1(39.9,38.5) v1(43.7,38.5)
  Bottom Layer w0.2: J3.8@19.727,32 20.397,32 ; J3.10@19.727,32.5 20.397,32.5 ; J3.2@19.827,30.5 20.497,30.5 ; J3.4@19.827,31 20.497,31 ; J3.6@19.827,31.5 20.497,31.5 ; v1(31.6,44.6) 33.9,44.6 v1(34.2,44.9) ; v1(34.3,34.9) 35.4,34.9 35.7,35.2 v1@37.5,35.2 ; v1(39.9,38.5) v1(39.9,42.5) v1@40,42.6 ; v1(47.3,47.3) 47.3,46.5 48.2,45.6 v1@48.2,45.5 ; v1(48.3,45.5) 48.3,43.6 49.3,42.6 v1@49.4,42.6
  other v1: 50.9,30.3 48.5,32.5 44.9,34.9 37.6,35.2
NetB_1: B.1 R4.2 | length 1
  Top Layer w0.254: B.1@27.2,41.4 27.208,41.392 R4.2
NetC6_2: C6.2@48.4,43.692 U0.47 | length 2.3
  Top Layer w0.2: U0.47 48,42.4 48,43.2 48.2,43.4 C6.2@48.2,43.8
NetC7_2: C7.2 U0.31 | length 2.4
  Top Layer w0.2: C7.2@43.9,31.4 44.7,32.2 44.7,32.9 U0.31
NetG_1: G.1 R2.2 | length 1.6
  Top Layer w0.2: G.1@26.93,42.7 27.73,43.5 R2.2@28.2,43.5
NetQ1_1: Q1.1 Q2.3 R10.2 | length 9
  Top Layer w0.2: Q2.3@49.8,38 49.8,34.9 50.9,33.8 R10.2@51.6,33.8 ; R10.2@51.5,33.9 R10.2@51.6,33.8 ; R10.2@51.65,33.75 R10.2@51.6,33.8 ; R10.2 R10.2@51.6,33.8 ; Q1.1@51.75,30.45 R10.2@51.75,33.75
NetR3_2: R3.2 R.1 | length 1.4
  Top Layer w0.2: R.1@26.93,44 27.63,44.7 R3.2@28,44.7
NetU2_12: U2.12 U2.13 | length 0.5
  Top Layer w0.2: U2.12@48.25,31.285 U2.13@48.75,31.285
NRST: C10.2 J3.55 U0.7 U?.7 | length 24.8
  Top Layer w0.15: U0.7@36.1,39.9 U?.7@36.85,38.95
  Top Layer w0.2: J3.55@19.2,43.7 22.5,43.7 23.5,42.7 v1(23.8,42.7) ; C10.2@31.6,43.6 v1(33.2,42) ; v1(34.2,39.9) U0.7@35.7,39.9
  Bottom Layer w0.2: v1(23.8,42.7) 25.1,42.7 25.8,42 v1(33.2,42) 34.1,40.9 35.3,40.9 35.6,40.6 35.6,40.1 35.4,39.9 v1(34.2,39.9) v1@34.1,39.9
PA4_ADC4_SS1: J3.33 U0.20 U?.14 | length 26
  Top Layer w0.2: J3.33@19,38.2 20.5,38.2 23.5,35.2 23.5,33.2 24.8,31.9 38.6,31.9 39.2,32.5 39.2,33 ; U?.14@39.15,34.7 U0.20
PA5_ADC5_SCK1: J3.31 U0.21 U?.15 | length 27.1
  Top Layer w0.2: J3.31@19.1,37.7 20.4,37.7 23.1,35 23.1,33 24.6,31.5 38.8,31.5 39.7,32.4 U0.21 ; U?.15@39.65,34.7 U0.21 ; U0.21@39.7,33.55 U0.21
PB5: J3.63 U0.57 U?.41 | length 26.4
  Top Layer w0.15: U0.57@41.2,44.45 U?.41@42.15,43.75
  Top Layer w0.2: J3.63@19,45.8 22.2,45.8 24,47.6 40.2,47.6 41.206,46.594 41.206,45.89 41.2,45.884 U0.57@41.2,44.75
PC0: J3.49 U0.8 | length 18.1
  Top Layer w0.2: J3.49@18.9,42.2 21.9,42.2 23.2,40.9 v1@24.1,40.9 ; v1@34.7,39.4 v1(34.8,39.4) U0.8 U0.8@35.95,39.4
  Bottom Layer w0.2: v1(24.2,40.9) 24.7,40.9 25.5,40.1 32.7,40.1 33.4,39.4 v1@34.7,39.4
PC1: J3.47 U0.9 | length 17.7
  Top Layer w0.2: J3.47@19.1,41.7 21.7,41.7 23.2,40.2 v1(23.5,40.2) v1@23.5,40.1 ; v1(34.2,38.9) U0.9 U0.9@35.85,38.9
  Bottom Layer w0.2: v1@23.6,40.2 24.8,40.2 25.3,39.7 32.5,39.7 33.3,38.9 v1@34,38.9
PC2: J3.45 U0.10 | length 18.6
  Top Layer w0.2: J3.45@19.2,41.2 21.4,41.2 23.9,38.7 25.4,38.7 25.4,39 v1@25.3,39.1 ; v1@34.7,38.4 v1(34.8,38.4) U0.10 U0.10@35.95,38.4
  Bottom Layer w0.2: v1(25.4,39.2) 32.4,39.2 33.2,38.4 v1@34.7,38.4
PC3: J3.46 U0.11 | length 17.8
  Top Layer w0.2: v1@34.1,37.9 v1(34.2,37.9) U0.11 U0.11@35.95,37.9
  Bottom Layer w0.2: J3.46@19.6,41.5 21.4,41.5 24.2,38.7 32.3,38.7 33.1,37.9 v1@34.1,37.9
PC4: J3.25 U0.24 | length 28
  Top Layer w0.2: J3.25@18.9,36.2 20.1,36.2 21.9,34.4 21.9,32.6 21.902,32.6 24.202,30.3 39.4,30.3 41.2,32.1 U0.24 U0.24@41.2,33.55
PC5: J3.23 U0.25 | length 28.7
  Top Layer w0.2: J3.23@18.8,35.7 20,35.7 20.2,35.5 21.5,34.2 21.5,32.5 21.503,32.5 24.056,29.948 39.548,29.948 39.648,29.948 41.694,31.994 41.694,33.544 U0.25@41.7,33.55
PC6: J3.36 U0.37 | length 35.2
  Top Layer w0.2: U0.37@47.25,37.4 47.9,37.4 v1@48.6,37.4
  Bottom Layer w0.2: J3.36@19.3,39 21.4,39 23.8,36.6 23.8,35.4 24.7,34.5 28.9,34.5 29.8,33.6 37.7,33.6 41.5,37.4 v1@48.6,37.4
  other v1: 48.5,37.4
PC7: J3.38 U0.38 | length 34.1
  Top Layer w0.2: U0.38@46.85,37.9 U0.38 v1@48.1,37.9
  Bottom Layer w0.2: J3.38@19.7,39.5 21.3,39.5 24.2,36.6 24.2,35.6 24.9,34.9 29.1,34.9 30,34 37.5,34 41.4,37.9 v1@48.1,37.9
  other v1: 48,37.9
PC8: J3.56 U0.39 | length 36.8
  Top Layer w0.2: U0.39@47.05,38.4 U0.39 v1@48.6,38.4
  Bottom Layer w0.2: J3.56@19.9,44 21.6,44 24.3,46.7 41,46.7 41.3,46.4 41.3,43 45.9,38.4 v1@48.6,38.4
  other v1: 48.5,38.4
PC9: J3.58 U0.40 | length 36.1
  Top Layer w0.2: U0.40@47.05,38.9 U0.40 v1@48.1,38.9
  Bottom Layer w0.2: J3.58@19.55,44.5 21.5,44.5 24.1,47.1 41.2,47.1 41.7,46.6 41.7,43.2 46,38.9 v1@48.1,38.9
  other v1: 48,38.9
PC10: J3.73 U0.51 | length 28.8
  Top Layer w0.2: J3.73@19.1,48.2 21.4,48.2 22.8,49.6 41.2,49.6 44.2,46.6 44.2,45.7 U0.51 U0.51@44.2,44.75
PC11: J3.71 U0.52 | length 28.1
  Top Layer w0.2: J3.71@19.1,47.7 21.6,47.7 23.1,49.2 41,49.2 43.7,46.5 U0.52 U0.52@43.7,44.75
PC12: J3.69 U0.53 | length 27.4
  Top Layer w0.2: J3.69@19.1,47.2 21.8,47.2 23.4,48.8 40.8,48.8 43.2,46.4 43.2,45.95 U0.53 U0.53@43.2,44.75
PC13: J3.57 U0.2 U?.2 | length 21.7
  Top Layer w0.15: U0.2@36.1,42.4 U?.2@36.85,41.45
  Top Layer w0.2: J3.57@18.7,44.2 22.4,44.2 24.6,46.4 30.8,46.4 34.8,42.4 35.85,42.4 U0.2 35.1,42.4
PC14: J3.50 U0.3 U?.3 | length 18.8
  Top Layer w0.15: U0.3 36.1,41.9 U?.3@36.85,40.95
  Top Layer w0.2: v1(32.6,43.7) 32.8,43.7 34.6,41.9 U0.3
  Bottom Layer w0.2: J3.50@19.8,42.5 21.9,42.5 23.1,43.7 v1(32.6,43.7)
PC15: J3.48 U0.4 U?.4 | length 19.9
  Top Layer w0.15: U0.4@36.1,41.4 U?.4@36.85,40.45
  Top Layer w0.2: v1@34.7,41.4 v1(34.8,41.4) U0.4 U0.4@35.95,41.4
  Bottom Layer w0.2: J3.48@18.575,42 22,42 23.3,43.3 31.8,43.3 32,43.1 33,43.1 v1@34.7,41.4
PD2: J3.67 U0.54 | length 26.8
  Top Layer w0.2: J3.67@19,46.7 21.9,46.7 23.6,48.4 40.6,48.4 42.7,46.3 U0.54 U0.54@42.7,44.75
PWEN: Q2.1 R6.1 | length 3.3
  Top Layer w0.2: Q2.1 48.9,35.6 48.9,35.8 49,35.9 49,38.6 R6.1@49.1,38.7
SWCLK: J3.68 J4.A8 U0.49 U?.37 | length 40.6
  Top Layer w0.15: U?.37@44.2,43.7 U?.37 44.15,43.75 U0.49@45.2,44.45
  Top Layer w0.2: U0.49@45.2,44.75 U0.49 45.2,45.6 ; v1(45.2,47.1) 45.2,45.6 ; v1@46.3,45 45.7,45.6 45.2,45.6 ; v1@51,40.8 v1(51,40.7) J4.A8@52.353,40.7
  Bottom Layer w0.2: J3.68@19.75,47 21.095,47 23.109,49.014 42.286,49.014 44.2,47.1 v1(45.2,47.1) ; v1(46.4,44.9) 46.4,44.7 50.3,40.8 v1@51,40.8
SWDIO: J3.70 J4.B8 U0.46 U?.34 | length 44
  Top Layer w0.15: U?.34@45.65,41 45.95,40.95 46.8,41.9 U0.46
  Top Layer w0.2: U0.46 v1(48,41.9) ; v1(49.1,39.9) 49.8,39.9 50.6,39.1 50.6,37.9 50.9,37.6 51.6,37.6 51.75,37.75 52.15,37.75 J4.B8@52.2,37.7
  Bottom Layer w0.2: J3.70@19.85,47.5 21.097,47.5 22.964,49.367 43.733,49.367 45.8,47.3 45.8,44.2 49.2,40.8 49.2,40 v1(49.1,39.9)
USB_DM: J3.74 J4.A7 J4.B7 R0.1 | length 45.9
  Top Layer w0.2: R0.1@49.6,40.9 49.6,40.7 50.6,39.7 J4.A7@52.15,39.7 ; v1@51.25,38.8 v1(51.3,38.8) ; 51.3,39.65 v1(51.3,38.8) ; J4.B7@52.353,38.7 51.4,38.7 v1(51.3,38.8)
  Bottom Layer w0.2: J3.74@19.9,48.4 21,48.4 22.7,50.1 46.3,50.1 ; 46.357,50.1 46.7,50.1 49.8,47 49.8,45.2 51,44 51,42.9 51.5,42.4 51.5,39.2 v1@51.2,38.9
USB_DM_R: R0.2 U0.44 U?.32 | length 4.1
  Top Layer w0.15: U?.32@45.95,39.95 U0.44@46.8,40.9
  Top Layer w0.2: U0.44 48.9,40.9 48.9,41.7 R0.2@49.2,41.7
USB_DP: J3.72 J4.A6 J4.B6 R1.1 | length 43.8
  Top Layer w0.2: v1(50.2,42.9) 50.4,43.1 50.4,43.6 R1.1@50.5,43.7 ; v1(50.3,41.6) 50.3,40.7 50.8,40.2 J4.B6@52.153,40.2 ; J4.A6@52.453,39.2 53.4,39.2 53.4,40.2 J4.B6@52.453,40.2
  Bottom Layer w0.2: J3.72@19.85,48 21.098,48 22.818,49.719 46.381,49.719 49.4,46.7 49.4,45 50.2,44.2 v1(50.2,42.9) 50.2,41.8 v1@50.4,41.6
USB_DP_R: R1.2 R7.1 U0.45 U?.33 | length 7.1
  Top Layer w0.15: U?.33@45.95,40.45 U0.45@46.8,41.4
  Top Layer w0.2: U0.45 48.5,41.4 48.5,42.5 49.5,43.5 49.5,43.7 R7.1@49.454,43.746 ; R7.1@49.4,43.6 49.4,43.692 R7.1@49.454,43.746 ; R7.1@49.5,43.792 R7.1@49.454,43.746 ; R7.1@49.6,43.592 R7.1@49.6,43.6 ; R7.1@49.6,43.7 R1.2@50.6,44.7
VCC_3V3: B.2 C0.2 C1.2 C2.2 G.2 J3.37 J3.39 L0.2 R7.2 R.2 SW.2 U0.1 U0.19 U0.32 U0.48 U0.64 U1.3 U2.3 U2.4 U?.1 U?.24 U?.36 U?.48 | length 95.8
  Top Layer w0.15: U0.1@36.1,42.9 U?.1@36.85,41.95 ; U?.1@36.851,41.956 U?.1@36.9,41.95 ; U0.64@37.7,44.45 U?.48@38.65,43.75 ; U?.24@44.15,34.65 U0.32@45.2,33.85 ; U?.36 45.85,41.95 U0.48@46.85,42.95
  Top Layer w0.2: J3.39@17.7,39.7 19.8,39.7 ; J3.37@17.8,39.2 19.9,39.2 ; 23.8,36.4 25,36.4 25.6,35.8 ; SW.2@24.3,39.7 24.35,39.65 24.35,39.8 25.5,39.8 ; SW.2@24.35,33.75 25.55,33.75 25.6,33.7 ; SW.2@24.4,33.8 SW.2@24.5,33.8 ; R.2@25.5,44.1 25.5,39.8 ; L0.2 35.77,34.47 37.1,35.8 37.6,35.8 38.6,36.8 38.6,41.95 ; U0.1@35.85,42.9 U0.1@35.881,42.9 ; L0.2@35.9,33.2 35.9,32.3 ; U0.1@36,43 36,44.9 C2.2 U0.64@37.7,44.9 ; U?.1 38.6,41.95 ; U0.64@37.7,44.75 U0.64 U0.64@37.7,44.9 ; U0.64@37.7,45.2 U0.64@37.7,44.9 ; 38.6,42 38.6,41.95 ; 38.65,42 U?.48 ; U0.19@38.7,33.55 38.7,32.6 38.4,32.3 35.9,32.3 ; C1.2@45,31.208 44.9,31.308 44.9,31.7 45.2,32 U0.32@45.2,33.4 ; U0.32 45.2,32.7 v1(46,32.7) ; U?.36@45.45,41.95 38.6,41.95 ; C0.2@46.15,46.2 47.2,46.2 U0.48@47.2,42.95 ; 47.3,46.2 49.5,46.2 49.5,45.5 ; U2.4@49.3,33.9 v1@49.825,33.9 ; R7.2@49.5,44.608 R7.2 49.5,45.5 ; U2.3@49.925,33.204 v1@49.925,34 ; v1(50.5,45.5) 49.5,45.5 ; 25.5,39.8 26.7,39.8 26.7,35.8 25.6,35.8 ; 25.6,33.7 27,32.3 35.9,32.3 ; 25.6,33.7 25.6,35.8
  Bottom Layer w0.2: 49.9,35.7 52,37.8 52,41.8
  Bottom Layer w0.4: v1(46,32.7) 46.5,32.2 46.5,30.8 47.8,30.8 47.8,33 48.3,33.5 49.5,33.5 v1(49.9,33.9)
VCC_5V: C5.2 J4.A4_B9 J4.A9_B4 Q1.2 R10.1 U1.2 U2.2 | length 27
  Top Layer w0.2: U1.2@49.9,47.6 U1.2@51.1,47.6 ; U2.2@50,32.7 v1@51.1,32.7 ; J4.A9_B4@52.4,41.75 53.85,41.75 54.3,41.3 54.3,37.1 ; J4.A4_B9@52.5,37.1 54.3,37.1 ; R10.1 v1(53.5,33.8) 54.3,33.8 ; Q1.2@53.55,30.55 53.55,33.05 54.3,33.8 ; 54.3,33.8 54.3,37.1
  Top Layer w0.4: C5.2@44.75,49 44.75,48 49,48 U1.2@49.1,47.9
  Bottom Layer w0.2: v1(51.2,32.6) 52.4,33.8 v1(53.5,33.8)
VCC_5V_SW: J3.1 J3.3 J3.5 J3.7 J3.9 J3.11 Q1.3 | length 12.5
  Top Layer w0.2: J3.1@18.7,30.2 20.203,30.2 ; J3.3@18.7,30.7 20.203,30.7 ; J3.5@18.7,31.2 20.203,31.2 ; J3.7@18.7,31.7 20.203,31.7 ; J3.9@18.7,32.2 20.203,32.2 ; J3.11@18.7,32.7 20.203,32.7
  Top Layer w0.4: 52.6,29.4 Q1.3@52.6,32.85
VDDA: C3.2 J3.41 L0.1 U0.13 U?.9 | length 23.1
  Top Layer w0.15: U0.13@36.1,36.95 U?.9@36.9,38
  Top Layer w0.2: J3.41@19,40.3 21.1,40.3 24.4,37 v1(25.2,37) ; v1(32.7,35.4) 33.4,35.4 ; C3.2@33.4,36 C3.2 33.4,35.4 ; C3.2@33.5,36.2 33.8,36.2 34.5,36.9 U0.13 U0.13@35.85,36.9 ; L0.1@34.2,33.8 33.9,33.8 33.4,34.3 33.4,35.4
  Bottom Layer w0.2: v1(25.2,37) 26.3,37 27,36.3 27.1,36.2 29.6,36.2 30.4,35.4 v1(32.7,35.4)
VSSA: C3.1 J3.44 R8.2 U0.12 U?.8 | length 22
  Top Layer w0.15: U0.12@36.094,37.405 36.89,38.45 U?.8
  Top Layer w0.2: C3.1@33.2,37.1 C3.1@33.4,37.1 ; R8.2@33.4,38.092 C3.1@33.4,37.1 ; C3.1@33.5,36.9 33.4,37 C3.1 C3.1@33.4,37.1 ; v1@34.6,37.4 v1(34.8,37.4) ; U0.12@35.85,37.4 U0.12 v1(34.8,37.4) ; C3.1@33.4,37.1 34.1,37.1 34.4,37.4 v1(34.8,37.4)
  Bottom Layer w0.2: J3.44@19.8,41 21.3,41 23.95,38.35 27.85,38.35 28.7,37.5 28.7,37.4 ; 28.8,37.3 28.9,37.4 34.5,37.4
XIN: C8.2 J3.53 U0.5 U?.5 Y0.1 | length 20.8
  Top Layer w0.15: U0.5@36.1,40.9 U?.5@36.85,39.95
  Top Layer w0.2: J3.53@19.1,43.2 22.3,43.2 23.4,42.1 v1(24.2,42.1) ; Y0.1@31.1,41.3 Y0.1@31.3,41.5 ; Y0.1@31.5,41.4 31.508,41.408 C8.2 ; Y0.1@31.6,40.8 32.1,41.3 32.1,40.9 U0.5 U0.5@35.8,40.9
  Bottom Layer w0.2: v1@24.3,42 24.4,42.1 24.8,42.1 25.8,41.1 v1(31.7,41.1)
XOUT: C9.2 J3.51 U0.6 U?.6 Y0.2 | length 25.1
  Top Layer w0.15: U0.6@36.1,40.4 U?.6@36.85,39.45
  Top Layer w0.2: J3.51@19,42.7 22.1,42.7 23.3,41.5 v1@23.6,41.5 ; Y0.2@31,36.7 31.2,36.5 31.2,35.492 C9.2@31.008,35.3 ; Y0.2@31.7,37.1 Y0.2@31.708,37.1 ; Y0.2@32.1,37.7 32.1,39 33.6,40.5 34.7,40.5 v1(34.8,40.4) U0.6 U0.6@35.85,40.4
  Bottom Layer w0.2: v1(23.7,41.5) 24.7,41.5 25.7,40.5 v1@34.8,40.5
~PA0_ADC0: J3.42 U0.14 U?.10 | length 19.4
  Top Layer w0.15: U0.14@36.1,36.45 U?.10@36.9,37.5
  Top Layer w0.2: v1@34.7,36.4 v1(34.8,36.4) U0.14 U0.14@35.95,36.4
  Bottom Layer w0.2: J3.42@19.7,40.5 21.3,40.5 23.8,38 27.3,38 28.3,37 34.2,37 v1(34.8,36.4)
~PA1_ADC1: J3.40 R4.1 U0.15 U?.11 | length 26
  Top Layer w0.15: U0.15@36.1,35.95 U?.11@36.9,37
  Top Layer w0.2: v1(27.3,37.2) 27.3,40.4 27.5,40.6 28.6,40.6 28.9,40.9 28.9,41.8 R4.1@28.3,42.4 ; v1@34.2,35.9 v1(34.3,35.9) U0.15 U0.15@35.95,35.9
  Bottom Layer w0.2: J3.40@19.6,40 21.3,40 23.7,37.6 26.9,37.6 27.248,37.252 27.9,36.6 33.4,36.6 v1@34.1,35.9
~PA2_ADC2_TX2: J3.43 U0.16 U?.12 | length 21.6
  Top Layer w0.15: U0.16@36.1,35.45 U?.12@36.9,36.5
  Top Layer w0.2: J3.43@19.1,40.7 21.3,40.7 24.4,37.6 26,37.6 v1(26,36.4) ; v1@34.7,35.4 v1(34.8,35.4) U0.16 U0.16@35.85,35.4
  Bottom Layer w0.2: v1@25.9,36.3 v1@26,36.3 ; v1@26.1,36.3 v1@26,36.3 ; v1(34.8,35.4) 33.9,35.4 33.4,34.9 30.3,34.9 29.5,35.7 26.6,35.7 v1@26,36.3
~PA3_ADC3_RX2: J3.35 U0.17 U?.13 | length 22.9
  Top Layer w0.2: J3.35@19,38.7 20.6,38.7 23.5,35.8 v1(24.8,35.8) ; v1@37.2,34.4 37.7,34.4 ; U0.17 37.7,34.4 ; U?.13@38.65,34.9 38.65,34.5 38.55,34.4 37.7,34.4
  Bottom Layer w0.2: v1(24.8,35.8) 24.8,35.7 25.2,35.3 29.3,35.3 30.2,34.4 37.1,34.4 v1(37.2,34.5)
~PA6_ADC6_MISO1: J3.29 U0.22 U?.16 | length 28
  Top Layer w0.2: J3.29@18.9,37.2 20.3,37.2 22.7,34.8 22.7,32.803 24.403,31.1 39,31.1 40.2,32.3 U0.22 ; U?.16@40.15,34.75 U0.22 ; U0.22@40.2,33.55 U0.22
~PA7_ADC7_MOSI1: J3.27 U0.23 U?.17 | length 28.7
  Top Layer w0.2: J3.27@18.8,36.7 20.2,36.7 21,35.9 22.3,34.6 22.3,32.7 24.31,30.69 39.19,30.69 40.7,32.2 U0.23 ; U?.17@40.65,34.7 U0.23 ; U0.23@40.7,33.55 U0.23
~PB0_ADC8: J3.26 U0.26 U?.18 | length 28.5
  Top Layer w0.15: U?.18 41.15,34.65 U0.26@42.2,33.85
  Top Layer w0.2: v1(42.2,32.2) U0.26@42.2,33.6
  Bottom Layer w0.2: J3.26@19.6,36.5 21.2,36.5 21.8,35.9 21.8,34.9 25,31.7 41.7,31.7 41.8,31.8 ; 41.757,31.757 v1(42.2,32.2)
~PB1_ADC9: J3.24 U0.27 U?.19 | length 28.2
  Top Layer w0.15: U?.19@41.65,34.65 U0.27@42.7,33.85
  Top Layer w0.2: v1@42.4,31.5 42.706,31.806 42.706,32.41 42.7,32.416 U0.27@42.7,33.5
  Bottom Layer w0.2: J3.24@19.8,36 21,36 21.4,35.6 21.4,34.8 24.9,31.3 v1@42.184,31.3
  other v1: 42.3,31.5
~PB8_CANRX: J3.61 U0.61 U?.45 | length 24.1
  Top Layer w0.15: U0.61@39.2,44.45 40.15,43.75 U?.45
  Top Layer w0.2: J3.61@18.9,45.3 22.3,45.3 24.2,47.2 38,47.2 39.2,46 U0.61@39.2,45
~PB9_CANTX: J3.59 U0.62 U?.46 | length 23.9
  Top Layer w0.15: U0.62@38.7,44.45 39.65,43.75 U?.46
  Top Layer w0.2: J3.59@18.9,44.8 22.4,44.8 24.4,46.8 37.8,46.8 38.7,45.9 U0.62 U0.62@38.7,44.55
pads on no net: J4.M

## Polygon pours and split planes (outlines as drawn)
VCC_5V on Top Layer "Bottom Layer-VCC_3V3" (solid, pour order 26): 51.8,48.6 58.7,48.6 58.7,28.8 50.7,28.8 50.7,33.3 51.8,34.522
no net on Top Layer "Top Layer-No Net" (solid, pour order 22): 24,29.4
GND on Bottom Layer "Bottom Layer-GND" (solid, remove dead copper, pour order 24): 58.7,28.9 58.7,50.1 23.3,50.1 23.3,28.9
VCC_3V3 on Bottom Layer "Bottom Layer-VCC_3V3" (solid, pour order 8): 49.1,46 52.4,46 52.4,33.3 48.8,33.3 48.8,34.978 49.1,35.311 49.1,38.5

## Other copper
Top Layer:
  rectangle net VCC_3V3: 36.6,44.2 37.2,45
  rectangle net VCC_3V3: 46.9,43.3 47.6,46.2
  rectangle net VCC_5V_SW: 21,28.8 52.8,29.7
  rectangle net VCC_5V_SW: 17.2,30.2 19.1,32.8
  region net VCC_3V3: 36,44.4 37.2,44.4 38.3,43.3 38.3,42.7 38.7,42.7 38.7,41.9 38.2,41.9 38,41.9 38,42.4 37.1,42.4 36,43.5
  region net VCC_3V3: 40.7,42 41.4,42.7 44.4,42.7 46.1,44.4 47.2,44.4 47.2,43.3 46.5,43.3 45.6,42.4 45.1,42.4 44.9,42.2 44.9,42 44.7,42
  region net GND: 38.4,35.8 38.4,36 39.2,36.8 39.2,38.5 40.4,38.5 43.4,41.5 44.9,41.5 44.9,39.8 44.8,39.7 42.5,39.7 42.3,39.5 42.3,35.8
  region net VCC_3V3: 38.6,39 40.3,39 43.2,41.9 38.6,41.9
  region net VCC_3V3: 38,36.2 38,42 38.7,42 38.7,36.8
  region net VCC_3V3: 24.2,36.2 23.6,36.2 20.7,39.1 19.6,39.1 19.6,39.8 21.1,39.8 24.2,36.7
  region net VCC_5V_SW: 21,28.8 21,29.6 20.5,30.1 19.6,30.1 19.6,32.8 20.8,32.8 23.8,29.8 23.8,28.8
  region net VCC_5V_SW: 17.3,30.2
  region: 25.4,41.5
  region: 25.6,41.4
  region: 28,36.9
  region: 31.7,36.7
  region net ^PB10_SCL2_RX3: 43.3,35
  region: 49.6,34.9
  region: 49.8,35.1
Bottom Layer:
  rectangle net GND: 38.2,42.1 40.9,45.2
  rectangle net GND: 54.4,28.9 58.7,35.7
  rectangle net GND: 21,28.8 58.7,29.8
  rectangle net GND: 17.3,30.4 19.6,32.5
  region net GND: 41.268,38.2 44,38.2 44,39.8 38.6,45.2 31.6,45.2 31.2,44.8 31.2,44.3 33,44.3 36,41.3 36,35.7 38.668,35.7
  region net GND: 21.9,30
  region net GND: 21.1,29.5 20.3,30.3 20.1,30.3 20.1,32.7 21.3,32.7 24.2,29.8 24.2,29.5

## Silkscreen, mask and mechanical layers (free items; w line width, h text height)
Top Overlay:
  pour cut-out: 37.3,32.7 45.6,32.7 45.6,32.9 cw(c47.7,32.9) 47.7,35 47.9,35 47.9,43.25 47.85,43.25 cw(c47.85,45.5) 45.6,45.5 45.6,45.6 37.3,45.6 37.3,45.5 cw(c35.1,45.5) 35.1,43.3 35,43.3 35,35 35.2,35 cw(c35.2,32.9) 37.3,32.9
  pour cut-out: 27.55,40.9 27.55,44.7 24.05,44.7 24.05,40.9
  text "B" at 21.5,29.5 h3
  text "JLCJLCJLCJLC" at 56.6,28.5 h0.8 r90
Bottom Overlay:
  text "B" at 57.1,28.5 h7
Board Outline (M30):
  lines w0.1: 16.6,34.5 19.54,34.5 ; 16.6,34.525 16.6,49.4 19.8,49.4 ccw(c19.8,50.2) 20.6,50.2 20.6,50.5 59.1,50.5 59.1,28.5 20.7,28.5 20.7,28.775 ccw(c19.9,28.775) 19.9,29.575 16.6,29.575 16.6,33.26 19.54,33.26 ; 19.55,33.26 ccw(c19.55,33.88) 19.55,34.5